# Altium PCB Flash烧录器STM32版.pcbdoc
Units mm, origin at the board's own origin, x right, y up, seen from the top; angles counter-clockwise.
Board outline 84.67 x 59.94 mm, 2 copper layers (Top Layer, Bottom Layer); 29 components, 59 nets, 142 pads, 32 vias.
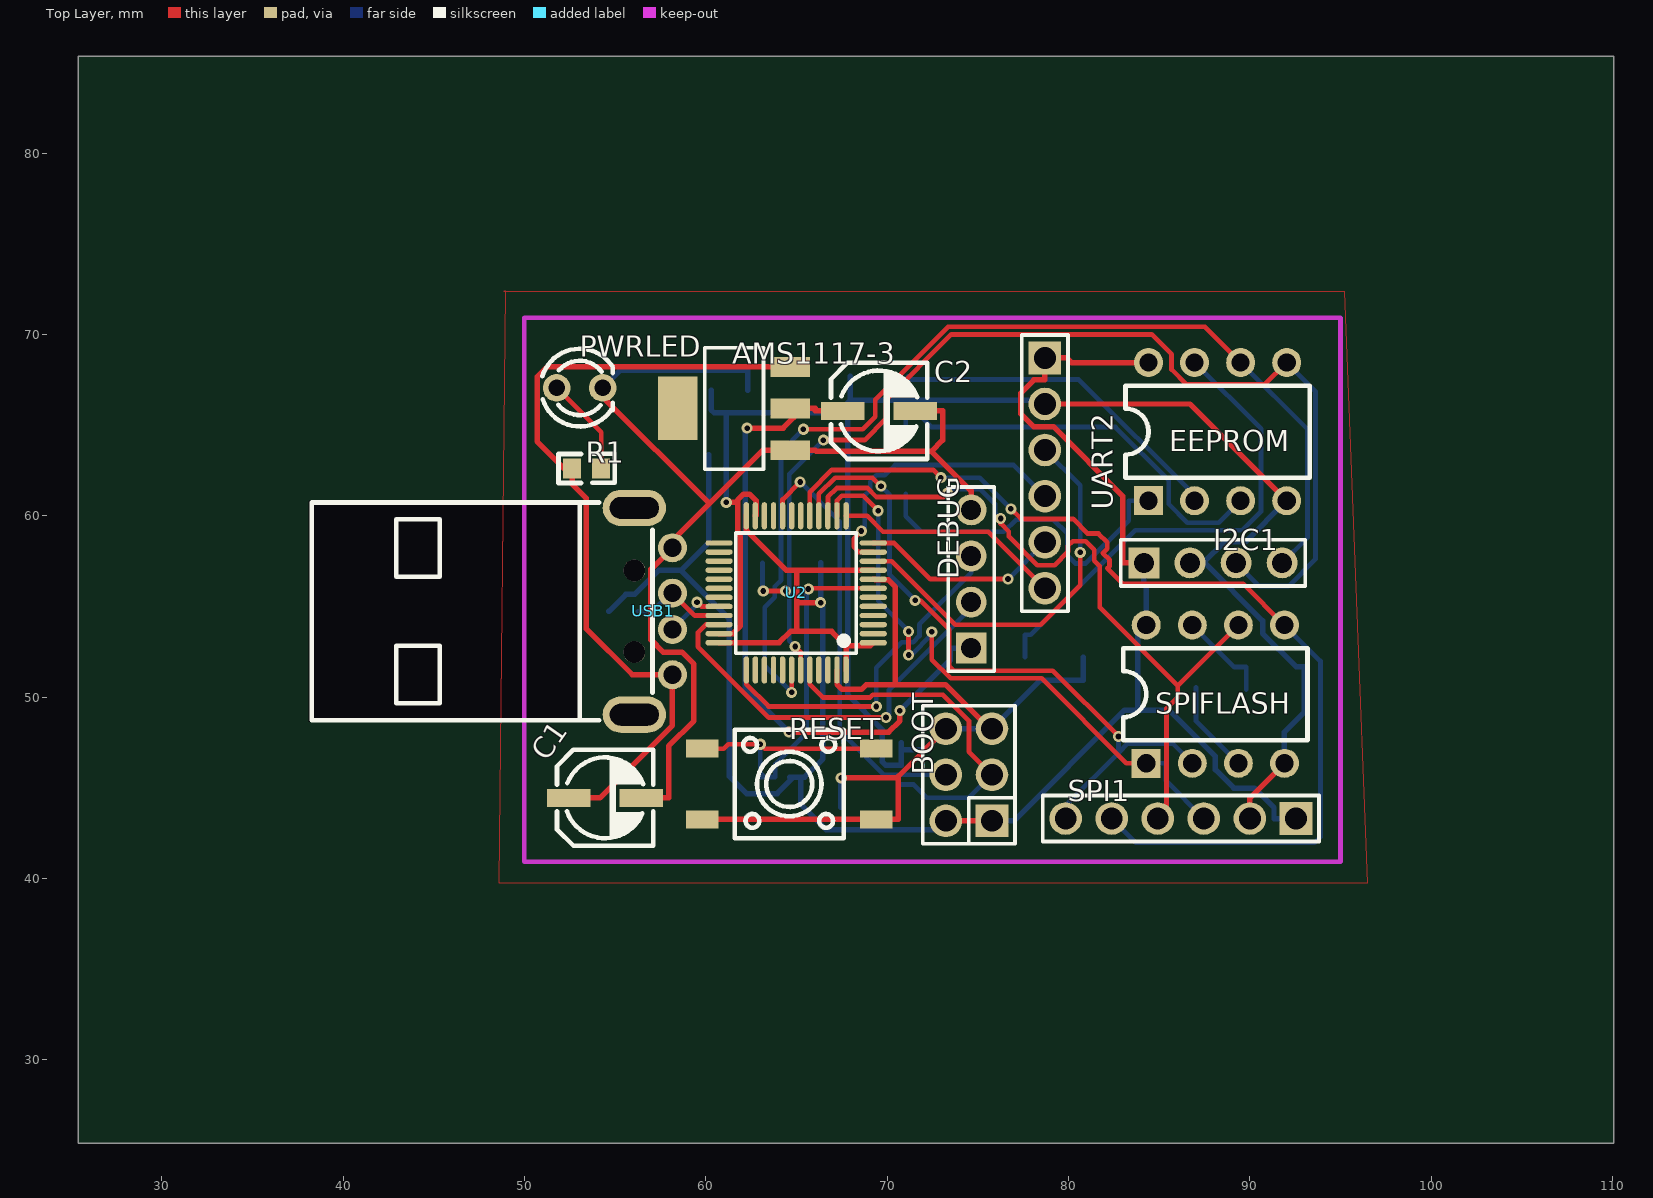
[diagram p0: Top Layer view]
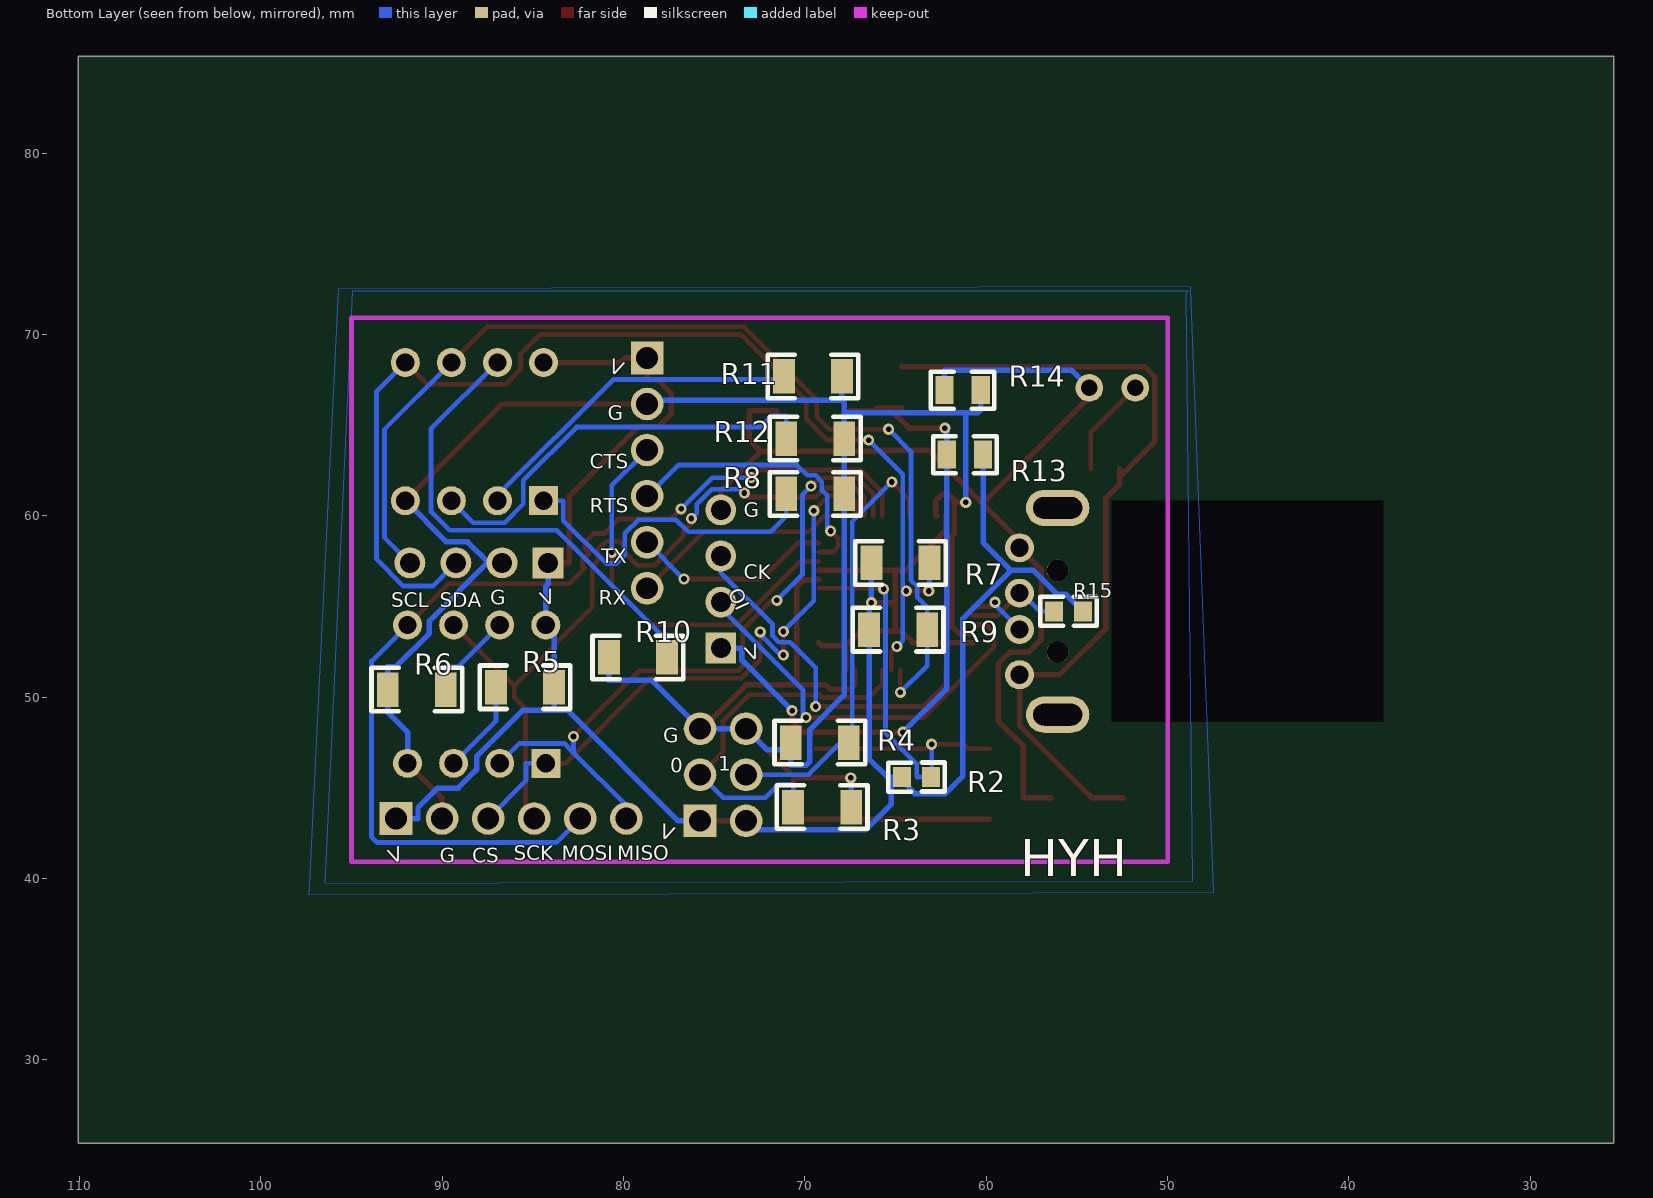
[diagram p1: Bottom Layer view, seen from below]

## Layer stack, top to bottom
Top Layer: signal copper (thickness not stored)
Dielectric: dielectric 0.32, FR-4, Dk 4.8
Bottom Layer: signal copper (thickness not stored)

## Board outline
110.075,25.4 25.4,25.4 25.4,85.344 110.075,85.344

## Components (designator, comment, footprint, x,y, rotation, side; value= is the part's Value field where it differs from the comment)
AMS1117-3 "AMS1117-3.3_C165482" SOT-223_L6.5-W3.5-P2.30-LS7.0-BR 61.561,65.913 r0 top
BOOT "210S-2*3P L=11.6MMGold-plated black" HDR-TH_6P-P2.54-V-R2-C3-S2.54 74.515,45.72 r90 top
C1 "100uF" CAP-SMD_BD5.0-L5.3-W5.3-FD 54.449,44.45 r0 top
C2 "100uF" CAP-SMD_BD5.0-L5.3-W5.3-FD 69.562,65.786 r0 top
DEBUG "MTP125-1104S1" HDR-TH_4P-P2.54-V 74.642,56.515 r90 top
EEPROM "DS1009-08AT1NX-0A2" DIP-8_L10.0-W6.5-P2.54-LS7.6-BL 88.231,64.643 r0 top
I2C1 "MTP125-1104S1" HDR-TH_4P-P2.54-V 87.977,57.404 r0 top
PWRLED "MHL3014SRTS" LED-TH_BD3.0-P2.54-FD 53.052,67.056 r0 top
R1 "1K" R0603#1 53.434,62.611 r0 top
R2 "1K" R0603#2 63.848,45.593 r0 bottom
R3 "10K" R1206 69.054,43.942 r0 bottom
R4 "10K" R1206 69.181,47.498 r0 bottom
R5 "10K" R1206 85.437,50.546 r0 bottom
R6 "10K" R1206 91.406,50.419 r0 bottom
R7 "10K" R1206 64.736,57.404 r0 bottom
R8 "10K" R1206 69.435,61.214 r0 bottom
R9 "10K" R1206 64.863,53.721 r0 bottom
R10 "10K" R1206 79.214,52.197 r0 bottom
R11 "10K" R1206 69.562,67.691 r0 bottom
R12 "10K" R1206 69.435,64.262 r0 bottom
R13 "0" R0805 61.18,63.373 r0 bottom
R14 "0" R0805 61.306,66.929 r0 bottom
R15 "1K" R0603#2 55.465,54.737 r0 bottom
RESET "K2-6639SP-C4SC-04" KEY-SMD_4P-L6.0-W6.0-P3.90-LS10.0 64.609,45.212 r0 top
SPI1 "Header-Male-2.54_1x6" HDR-TH_6P-P2.54-V 86.199,43.307 r180 top
SPIFLASH "DS1009-08AT1NX-0A2" DIP-8_L10.0-W6.5-P2.54-LS7.6-BL 88.104,50.165 r0 top
U2 "STM32F103C8T6" LQFP-48_L7.0-W7.0-P0.50-LS9.0-BL 64.99,55.753 r90 top
UART2 "Header-Male-2.54_1x6" HDR-TH_6P-P2.54-V 78.706,62.357 r270 top
USB1 "USB-05" USB-A-TH_48037-0001 57.116,54.737 r270 top

## Footprints (in the part's own frame and the unit in brackets; to place one, negate y for a bottom-side part, rotate by r counter-clockwise, add the part's x,y. Pads: shape width x height; smd on the part's side, far side on the other; paste and mask are expansions set on the pad)
CAP-SMD_BD5.0-L5.3-W5.3-FD [mm]
  rect 2.4x1 smd: 1(-2,0) 2(2,0)
  silkscreen extent -2.65,-2.65 2.65,2.65
DIP-8_L10.0-W6.5-P2.54-LS7.6-BL [mil]
  rect 63x63 hole 39.37: 1(-150,-150)
  round 63 hole 39.37: 2(-50,-150) 3(50,-150) 4(150,-150) 5(150,150) 6(50,150) 7(-50,150) 8(-150,150)
  silkscreen extent -200,-100 200,100
HDR-TH_4P-P2.54-V [mm]
  rect 1.7x1.7 hole 1.1: 1(-3.81,0)
  round 1.7 hole 1.1: 2(-1.27,0) 3(1.27,0) 4(3.81,0)
  silkscreen extent -5.08,-1.27 5.08,1.27
HDR-TH_6P-P2.54-V [mm]
  rect 1.8x1.8 hole 1.2: 1(-6.35,0)
  round 1.8 hole 1.2: 2(-3.81,0) 3(-1.27,0) 4(1.27,0) 5(3.81,0) 6(6.35,0)
  silkscreen extent -7.62,-1.27 7.62,1.27
HDR-TH_6P-P2.54-V-R2-C3-S2.54 [mm]
  rect 1.8x1.8 hole 1.2: 1(-2.54,-1.27)
  round 1.8 hole 1.2: 2(-2.54,1.27) 3(0,-1.27) 4(0,1.27) 5(2.54,-1.27) 6(2.54,1.27)
  silkscreen extent -3.81,-2.54 3.81,2.54
KEY-SMD_4P-L6.0-W6.0-P3.90-LS10.0 [mm]
  rect 1.8x1 smd: 1(-4.8,1.95) 2(4.8,1.95) 3(-4.8,-1.95) 4(4.8,-1.95)
  silkscreen extent -3,-3 3,3
LED-TH_BD3.0-P2.54-FD [mil]
  round 60 hole 36: 1(-50,0) 2(50,0)
  silkscreen extent -81,-84 72,85
LQFP-48_L7.0-W7.0-P0.50-LS9.0-BL [mm]
  oval 0.3x1.5 smd: 1(-2.75,-4.25) 2(-2.25,-4.25) 3(-1.75,-4.25) 4(-1.25,-4.25) 5(-0.75,-4.25) 6(-0.25,-4.25) 7(0.25,-4.25) 8(0.75,-4.25) 9(1.25,-4.25) 10(1.75,-4.25) 11(2.25,-4.25) 12(2.75,-4.25) 25(2.75,4.25) 26(2.25,4.25) 27(1.75,4.25) 28(1.25,4.25) 29(0.75,4.25) 30(0.25,4.25) 31(-0.25,4.25) 32(-0.75,4.25) 33(-1.25,4.25) 34(-1.75,4.25) 35(-2.25,4.25) 36(-2.75,4.25)
  oval 1.5x0.3 smd: 13(4.25,-2.75) 14(4.25,-2.25) 15(4.25,-1.75) 16(4.25,-1.25) 17(4.25,-0.75) 18(4.25,-0.25) 19(4.25,0.25) 20(4.25,0.75) 21(4.25,1.25) 22(4.25,1.75) 23(4.25,2.25) 24(4.25,2.75) 37(-4.25,2.75) 38(-4.25,2.25) 39(-4.25,1.75) 40(-4.25,1.25) 41(-4.25,0.75) 42(-4.25,0.25) 43(-4.25,-0.25) 44(-4.25,-0.75) 45(-4.25,-1.25) 46(-4.25,-1.75) 47(-4.25,-2.25) 48(-4.25,-2.75)
  silkscreen extent -3.33,-3.31 3.3,3.34
R0603#1 [mm]
  rect 1x1.1 smd: 1(-0.8,0) 2(0.8,0)
  silkscreen extent -1.55,-0.8 1.55,0.81
R0603#2 [mm]
  rect 1x1.1 smd: 1(0.8,0) 2(-0.8,0)
  silkscreen extent -1.55,-0.81 1.55,0.8
R0805 [mm]
  rect 1x1.55 smd: 1(1,0) 2(-1,0)
  silkscreen extent -1.75,-1.02 1.75,1.02
R1206 [mm]
  rect 1.2x1.9 smd: 1(1.6,0) 2(-1.6,0)
  silkscreen extent -2.5,-1.2 2.5,1.2
SOT-223_L6.5-W3.5-P2.30-LS7.0-BR [mil]
  rect 85x43 smd: 1(122,-90.5) 2(122,0.5) 3(122,90.5)
  rect 85x138 smd: 4(-122,0.5)
  silkscreen extent -64,-132 64,132
USB-A-TH_48037-0001 [mm]
  round 1.6 hole 1: 1(3.5,1.05) 2(1,1.05) 3(-1,1.05) 4(-3.5,1.05)
  oval 2x3.5 hole 1.2 slot 2.7 at 90 deg: 5(-5.7,-1.05) 6(5.7,-1.05)
  round 1.2 hole 1.2 unplated: ""(-2.25,-1.05) ""(2.25,-1.05)
  Multi-Layer board cut-out: -6.096,-4.03 6.096,-4.03 6.096,-19.016 -6.096,-19.016
  silkscreen extent -6,-18.85 6,-0.05

## Via types
v1: diameter 0.61, hole 0.31, Top Layer to Bottom Layer, 32 vias

## Nets (pads, with @x,y where several pads share a name; then routed paths per layer and width w, separated by ;. In a path a pad name is that pad's centre, name@x,y a point inside that pad or via, vN(x,y) a via of type N, cw(c..) or ccw(c..) an arc to the next point about the centre after c; other vN are vias at no path point)
+5V: AMS1117-3.3 C1.1 R1.1 USB1.1 | length 45.6
  Top Layer w0.3: C1.1@52.45,44.45 54.17,44.45 58.165,48.445 USB1.1 55.953,51.237 53.423,53.769 53.423,60.963 52.633,61.75 R1.1@52.633,62.182 ; R1.1 R1.1@52.633,62.182 ; AMS1117-3.3 51.249,68.212 50.702,67.666 50.702,64.112 R1.1@52.633,62.182
AMS1117-3_4: AMS1117-3.4
BOOT0: BOOT.3 R3.1 U2.44 | length 21.2
  Top Layer w0.26: U2.44@65.742,51.496 65.742,50.714 66.466,49.987 69.067,49.987 69.217,50.137 73.085,50.137 74.515,48.707 74.515,46.99 BOOT.3
  Bottom Layer w0.26: R3.1@70.654,43.942 70.654,45.184 71.47,45.184 72.204,44.45 74.515,44.45 BOOT.3
BOOT1: BOOT.4 R4.2 U2.20 | length 24.2
  Top Layer w0.26: U2.20@64.241,59.997 64.241,60.896 v1(65.211,61.867)
  Bottom Layer w0.26: v1(65.211,61.867) 67.393,59.687 67.393,48.156 R4.2@67.581,47.968 ; R4.2 R4.2@67.581,47.968 ; BOOT.4 69.829,45.72 R4.2@67.581,47.968
DM: U2.32 USB1.2 | length 3.4
  Top Layer w0.26: v1(59.519,55.235) 59.753,55.001 U2.32@60.746,55.001
  Bottom Layer w0.26: USB1.2 59.519,55.09 v1(59.519,55.235)
DP: R15.1 U2.33 USB1.3 | length 5.4
  Top Layer w0.26: USB1.3 59.402,54.503 U2.33@60.746,54.503
  Bottom Layer w0.26: R15.1 57.058,54.737 58.058,55.738 USB1.3
EEPROM_A0: EEPROM.1 R8.1 | length 19
  Bottom Layer w0.26: R8.1@71.035,61.214 71.035,59.972 71.891,59.116 76.443,59.116 77.113,59.787 79.176,59.787 79.935,59.027 79.935,57.828 80.39,57.374 80.962,57.374 83.329,59.741 83.329,60.833 EEPROM.1
EEPROM_A1: EEPROM.2 R11.1 | length 18.8
  Bottom Layer w0.26: R11.1@71.162,67.691 71.337,67.513 80.578,67.513 86.961,61.133 EEPROM.2
EEPROM_A2: EEPROM.3 R12.1 | length 23.4
  Bottom Layer w0.26: R12.1@71.035,64.262 71.035,65.504 71.851,65.504 72.458,64.897 82.597,64.897 85.541,61.953 85.541,60.653 86.567,59.627 88.294,59.627 EEPROM.3
EEPROM_WP: EEPROM.7 R10.2 | length 26.8
  Bottom Layer w0.26: R10.2 77.614,53.439 77.919,53.439 83.682,59.205 89.585,59.205 90.624,60.241 90.624,64.79 EEPROM.7
FLASH_HOLD: R6.2 SPIFLASH.7 | length 5.2
  Bottom Layer w0.26: SPIFLASH.7 89.148,51.661 89.806,51.661 R6.2
FLASH_WP: R5.1 SPIFLASH.3 | length 5.2
  Bottom Layer w0.26: R5.1@87.037,50.546 87.037,48.692 SPIFLASH.3
GND: AMS1117-3.1 C1.2 C2.2 DEBUG.4 PWRLED.2 R14.1 USB1.4 | length 61.1
  Top Layer w0.3: PWRLED.2 54.322,66.558 60.2,60.681 ; C1.2@56.451,44.45 57.959,44.45 57.959,47.305 59.344,48.689 59.344,51.829 58.686,52.487 57.66,52.487 56.979,53.17 56.979,57.048 USB1.4 58.165,58.649 60.2,60.681 ; C2.2@71.564,65.786 73.072,65.786 73.072,64.171 72.465,63.561 ; DEBUG.4 74.642,61.382 72.465,63.561 ; 60.2,60.681 63.133,63.614 63.27,63.614 AMS1117-3.1 66.049,63.614 66.103,63.561 72.465,63.561
  Bottom Layer w0.3: PWRLED.2 55.295,68.029 62.293,68.029 62.308,68.014 R14.1@62.308,66.929
I2C_SCL: EEPROM.6 I2C1.4 R9.2 U2.42 | length 58.2
  Top Layer w0.26: v1(64.741,50.262) U2.42@64.741,51.496 ; v1(65.384,64.775) 68.665,64.775 69.351,65.461 69.351,66.411 73.364,70.424 87.53,70.424 EEPROM.6
  Bottom Layer w0.26: v1(64.741,50.262) 63.263,51.74 R9.2 63.263,54.963 63.814,55.512 63.814,56.104 64.154,56.446 64.154,63.546 v1(65.384,64.775) ; EEPROM.6 93.187,64.767 93.187,58.804 I2C1.4
I2C_SDA: EEPROM.5 I2C1.3 R7.2 U2.43 | length 64.5
  Top Layer w0.26: v1(63.174,55.855) v1(64.411,55.855) ; v1(64.934,52.794) 65.241,52.489 U2.43@65.241,51.496 ; v1(66.486,64.178) 68.759,64.178 69.923,65.341 69.923,66.385 73.54,70.002 84.599,70.002 85.691,68.908 85.691,68.069 86.506,67.254 90.842,67.254 EEPROM.5
  Bottom Layer w0.26: R7.2 63.136,55.893 v1(63.174,55.855) ; v1(64.411,55.855) v1@64.614,55.855 ; v1(64.934,52.794) 64.614,53.114 v1@64.614,55.855 ; v1(66.486,64.178) 64.614,62.306 v1@64.614,55.855 ; I2C1.3 90.525,56.126 92.15,56.126 93.626,57.602 93.626,66.868 EEPROM.5
NRST: R2.2 RESET.1 RESET.2 U2.7 | length 27.2
  Top Layer w0.26: RESET.1 61.002,47.163 61.243,47.404 v1(63.016,47.404) 63.26,47.163 RESET.2@69.41,47.163 ; v1(65.663,55.966) 65.699,56.002 U2.7@69.247,56.002
  Bottom Layer w0.26: v1(63.016,47.404) 63.016,45.822 R2.2@63.245,45.593 ; R2.2 R2.2@63.245,45.593 ; v1(65.663,55.966) 65.554,55.857 65.554,48.024 63.839,46.312 63.839,45.593 R2.2@63.245,45.593
PWRLED_1: PWRLED.1 R1.2 | length 5.5
  Top Layer w0.26: PWRLED.1 54.233,64.605 R1.2
S$18: 
S$30: 
S$37: 
S$39: 
S$41: 
SPI_CLK: SPI1.4 SPIFLASH.6 U2.15 | length 41.5
  Top Layer w0.26: U2.15@66.74,59.997 66.74,61.049 67.225,61.534 68.924,61.534 69.417,61.039 73.118,61.039 v1(73.339,61.262) ; v1(76.263,59.855) 76.263,59.578 76.704,59.136 76.704,58.862 78.289,57.277 79.237,57.277 79.979,58.019 79.979,58.346 80.235,58.603 80.954,58.603 81.424,58.133 81.424,57.528 81.724,57.229 81.724,54.948 86.034,50.635 ; SPI1.4 85.414,43.792 85.414,49.38 85.97,49.939 86.034,50.002 86.034,50.635 ; SPIFLASH.6 86.034,50.635
  Bottom Layer w0.26: v1(73.339,61.262) 73.55,61.473 75.145,61.473 75.968,60.65 75.968,60.147 v1(76.263,59.855)
SPI_CS: SPI1.3 SPIFLASH.1 U2.14 | length 34.8
  Top Layer w0.26: U2.14@67.24,59.997 67.24,60.843 67.51,61.112 68.678,61.112 v1(69.509,60.279) ; v1(71.188,52.324) v1(71.188,53.624) ; v1(72.468,53.599) 72.468,52.075 73.507,51.036 78.521,51.036 83.202,46.355 SPIFLASH.1
  Bottom Layer w0.26: v1(69.509,60.279) 69.509,55.303 v1(71.188,53.624) ; v1(71.188,52.324) 71.332,52.324 72.468,53.459 v1(72.468,53.599) ; SPIFLASH.1 85.386,46.355 85.386,45.39 SPI1.3
SPI_MISO: SPI1.6 SPIFLASH.2 U2.16 | length 38.3
  Top Layer w0.26: U2.16@66.24,59.997 66.24,61.211 67.139,62.108 69.194,62.108 v1(69.666,61.638) ; v1(71.553,55.342) 71.825,55.342 73.433,53.736 73.433,51.709 73.682,51.46 79.14,51.46 v1(82.767,47.833)
  Bottom Layer w0.26: v1(69.666,61.638) 70.141,61.161 70.141,56.754 v1(71.553,55.342) ; SPI1.6 79.849,44.028 82.767,46.947 ; v1(82.767,47.833) 82.767,46.947 ; SPIFLASH.2 85.742,47.447 83.268,47.447 82.767,46.947
SPI_MOSI: SPI1.5 SPIFLASH.5 U2.17 | length 57.4
  Top Layer w0.26: U2.17@65.742,59.997 65.742,61.308 66.964,62.532 72.546,62.532 v1(72.968,62.108) ; v1(76.831,60.386) 77.388,59.827 80.258,59.827 81.061,59.025 81.657,59.025 82.14,58.542 82.14,58.191 81.899,57.95 82.27,57.579 82.27,57.229 82.148,57.104 82.994,56.256 89.633,56.256 SPIFLASH.5
  Bottom Layer w0.26: v1(72.968,62.108) 75.107,62.108 v1(76.831,60.386) ; SPI1.5 83.715,41.981 93.593,41.981 93.898,42.286 93.898,51.991 SPIFLASH.5
SWDCLK: DEBUG.3 U2.37 | length 19.3
  Top Layer w0.26: U2.37@62.242,51.496 62.242,50.711 63.469,49.487 v1(69.41,49.487)
  Bottom Layer w0.26: v1(69.41,49.487) 69.41,51.631 70.807,53.028 71.437,53.028 71.787,53.378 71.787,54.013 74.642,56.871 DEBUG.3
SWDIO: DEBUG.2 U2.34 | length 22.4
  Top Layer w0.26: U2.34@60.746,54.003 60.014,54.003 59.575,53.564 59.575,52.774 63.471,48.877 v1(69.943,48.877)
  Bottom Layer w0.26: v1(69.943,48.877) 70.108,49.042 70.108,50.394 74.642,54.927 DEBUG.2
U2_2: U2.2
U2_3: U2.3
U2_4: U2.4
U2_5: U2.5
U2_6: U2.6
U2_18: U2.18
U2_19: U2.19
U2_21: U2.21
U2_22: U2.22
U2_25: U2.25
U2_26: U2.26
U2_27: U2.27
U2_28: U2.28
U2_29: U2.29
U2_30: U2.30
U2_31: U2.31
U2_38: U2.38
U2_39: U2.39
U2_40: U2.40
U2_41: U2.41
U2_45: U2.45
U2_46: U2.46
UART_CTS: U2.10 UART2.3 | length 22
  Top Layer w0.26: U2.10@69.247,57.503 70.263,57.503 73.768,53.998 78.47,53.998 80.654,56.185 v1(80.654,57.986)
  Bottom Layer w0.26: UART2.3 80.654,61.679 v1(80.654,57.986)
UART_RTS: U2.11 UART2.4 | length 15.9
  Top Layer w0.26: v1(68.587,59.162) 68.157,58.73 68.157,58.296 68.449,58.001 U2.11@69.247,58.001
  Bottom Layer w0.26: v1(68.587,59.162) 68.77,59.342 68.77,61.123 69.069,61.422 69.069,61.885 69.417,62.235 69.879,62.235 70.443,62.799 76.994,62.799 UART2.4
UART_RX: U2.13 UART2.6 | length 12.6
  Top Layer w0.26: U2.13@67.741,59.997 68.899,59.997 69.778,59.118 75.594,59.118 UART2.6
UART_TX: U2.12 UART2.5 | length 11.1
  Top Layer w0.26: U2.12@69.247,58.501 70.4,58.501 72.386,56.515 v1(76.674,56.515)
  Bottom Layer w0.26: v1(76.674,56.515) UART2.5
USB1_5: USB1.5
USB1_6: USB1.6
VCC: AMS1117-3.2 C2.1 DEBUG.1 R13.1 | length 37.1
  Top Layer w0.3: v1(62.282,64.836) 64.266,64.836 AMS1117-3.2@65.356,65.926 ; v1(64.596,48.075) 70.09,48.075 70.705,48.689 v1(70.705,49.261) ; AMS1117-3.2 AMS1117-3.2@65.356,65.926 ; C2.1@67.563,65.786 66.052,65.786 66.052,65.923 66.049,65.926 AMS1117-3.2@65.356,65.926
  Bottom Layer w0.3: v1(62.282,64.836) 62.181,64.732 62.181,63.373 62.181,50.49 v1(64.596,48.075) ; v1(70.705,49.261) 73.481,52.037 73.481,52.705 DEBUG.1
VDD: BOOT.1 BOOT.2 EEPROM.8 I2C1.1 R2.1 R5.2 R7.1 R9.1 R13.2 R15.2 SPI1.1 SPIFLASH.8 U2.1 U2.9 U2.24 U2.36 U2.48 UART2.1 | length 131.6
  Top Layer w0.3: U2.36@60.746,53.002 64.05,53.002 64.685,53.635 65.028,53.635 ; U2.24@62.242,59.997 62.242,59.192 64.431,57.003 65.028,57.003 ; v1(66.336,55.209) 65.028,55.209 ; U2.48@67.741,51.496 67.741,52.837 ; U2.1@69.247,53.002 69.082,52.837 67.741,52.837 ; U2.9@69.247,57.003 65.028,57.003 ; BOOT.2 BOOT.1 ; I2C1.1 83.006,57.404 83.006,61.079 79.171,64.917 78.089,64.917 77.378,65.626 77.378,66.774 78.101,67.495 78.706,67.495 UART2.1 79.283,68.707 79.918,68.707 80.172,68.453 EEPROM.8 ; 65.028,53.635 65.028,55.209 ; 65.028,53.635 66.941,53.635 67.741,52.837 ; 65.028,55.209 65.028,57.003
  Bottom Layer w0.3: R15.2 55.602,55.674 56.087,55.674 57.4,56.987 58.64,56.987 ; R13.2 60.179,58.527 58.64,56.987 ; R2.1 R2.1@64.85,45.593 ; R7.1 v1(66.336,55.209) 66.463,55.082 66.463,54.981 R9.1 66.463,46.599 65.457,45.593 65.252,45.593 ; BOOT.2 72.745,42.68 66.659,42.68 65.252,44.087 65.252,45.593 ; BOOT.1 76.997,43.18 83.1,49.286 83.837,49.286 ; I2C1.1 84.167,56.243 84.294,56.116 SPIFLASH.8 83.837,53.518 R5.2 83.837,49.286 ; SPI1.1 91.34,43.307 91.34,43.912 90.266,44.986 89.128,44.986 88.104,46.01 88.104,46.731 85.549,49.286 83.837,49.286 ; 58.64,56.987 61.297,54.331 61.297,45.646 62.262,44.684 63.941,44.684 R2.1@64.85,45.593 ; R2.1@64.85,45.593 65.053,45.593 65.252,45.593
VSS: BOOT.5 BOOT.6 EEPROM.4 I2C1.2 R3.2 R4.1 R6.1 R8.2 R10.1 R11.2 R12.2 R14.2 RESET.3 RESET.4 SPI1.2 SPIFLASH.4 U2.8 U2.23 U2.35 U2.47 UART2.2 | length 152.2
  Top Layer w0.3: RESET.3 69.41,43.261 70.619,43.261 70.619,45.55 ; U2.35@60.746,53.503 61.492,53.503 61.917,53.927 61.917,58.862 61.764,59.014 61.764,60.744 ; v1(61.134,60.744) 61.764,60.744 ; U2.23@62.742,59.997 62.778,60.033 62.778,60.112 62.778,60.836 62.417,61.194 62.097,61.194 61.764,60.863 61.764,60.744 ; U2.47@67.24,51.496 67.24,50.706 67.517,50.429 68.589,50.429 68.856,50.696 70.461,50.696 ; v1(67.474,45.55) 70.619,45.55 ; U2.8@69.247,56.502 69.323,56.502 69.361,56.464 70.073,56.464 70.461,56.076 70.461,50.696 ; BOOT.6 70.619,45.634 70.619,45.55 ; BOOT.5 75.658,48.26 73.22,50.696 70.461,50.696 ; UART2.2 86.707,66.167 EEPROM.4 ; SPI1.2 90.009,44.45 SPIFLASH.4
  Bottom Layer w0.3: R14.2 60.306,65.844 60.476,65.674 61.134,65.674 ; v1(61.134,60.744) 61.134,65.674 ; R3.2 67.454,45.529 v1(67.474,45.55) ; R11.2 67.962,66.431 67.962,66.368 ; R4.1@70.781,47.498 R4.1@70.781,47.099 ; UART2.2 78.505,66.368 67.962,66.368 ; R10.1@80.814,52.197 80.814,50.937 78.462,50.937 BOOT.5 BOOT.6 72.084,47.099 R4.1@70.781,47.099 ; I2C1.2 86.748,57.445 I2C1.2@87.479,57.445 ; SPIFLASH.4 91.914,48.067 93.006,49.159 93.006,50.419 93.006,51.679 92.552,51.679 90.718,53.513 90.718,54.204 I2C1.2@87.479,57.445 ; EEPROM.4 89.775,58.565 88.602,58.565 I2C1.2@87.479,57.445 ; 61.134,65.674 67.835,65.674 ; 67.835,65.674 R12.2 R8.2 67.835,59.954 67.835,50.112 69.745,48.202 69.745,46.429 69.938,46.238 70.781,46.238 R4.1@70.781,47.099 ; 67.835,65.674 67.835,66.241 67.962,66.368
pads on no net: USB1.

## Polygon pours and split planes (outlines as drawn)
GND on Bottom Layer (solid): 48.861,72.39 94.962,72.39 96.486,39.751 48.607,39.878 48.988,72.263
VSS on Bottom Layer (solid): 48.734,72.644 95.724,72.517 97.375,39.116 47.464,39.243 48.734,72.517
GND on Top Layer (solid): 48.607,39.751 48.988,72.39 48.861,72.39 48.988,72.39 95.216,72.39 96.486,39.751 48.607,39.751

## Silkscreen, mask and mechanical layers (free items; w line width, h text height)
Bottom Overlay:
  text "V" at 80.881,67.953 h0.8 r21
  text "G" at 80.865,65.259 h0.8
  text "CTS" at 81.881,62.592 h0.8
  text "RTS" at 81.881,60.179 h0.8
  text "G" at 73.372,59.925 h0.8
  text "TX" at 81.246,57.385 h0.8
  text "CK" at 73.372,56.496 h0.8
  text "RX" at 81.373,55.099 h0.8
  text "G" at 87.342,55.099 h0.8
  text "IO" at 73.009,55.033 h0.8 r245
  text "V" at 84.405,54.999 h0.8 r339
  text "SDA" at 90.136,54.972 h0.8
  text "SCL" at 92.803,54.972 h0.8
  text "V" at 73.102,51.951 h0.8 r339
  text "G" at 77.817,47.479 h0.8
  text "1" at 74.769,45.955 h0.8
  text "0" at 77.436,45.828 h0.8
  text "V" at 78.087,42.299 h0.8 r21
  text "MISO" at 80.357,41.002 h0.8
  text "MOSI" at 83.405,41.002 h0.8
  text "SCK" at 86.072,41.002 h0.8
  text "CS" at 88.358,40.875 h0.8
  text "G" at 90.136,40.875 h0.8
  text "V" at 92.787,40.775 h0.8 r339
  text "HYH" at 58.132,40.132 h2.03
Document:
  lines w0.003: 67.712,55.347 67.763,55.397